# Altium PCB dxf.PcbDoc
Units mm, origin at the board's own origin, x right, y up, seen from the top; angles counter-clockwise.
Board outline 91.85 x 91.85 mm, 2 copper layers (Top Layer, Bottom Layer); 1 components, 0 nets, 0 pads, 0 vias.
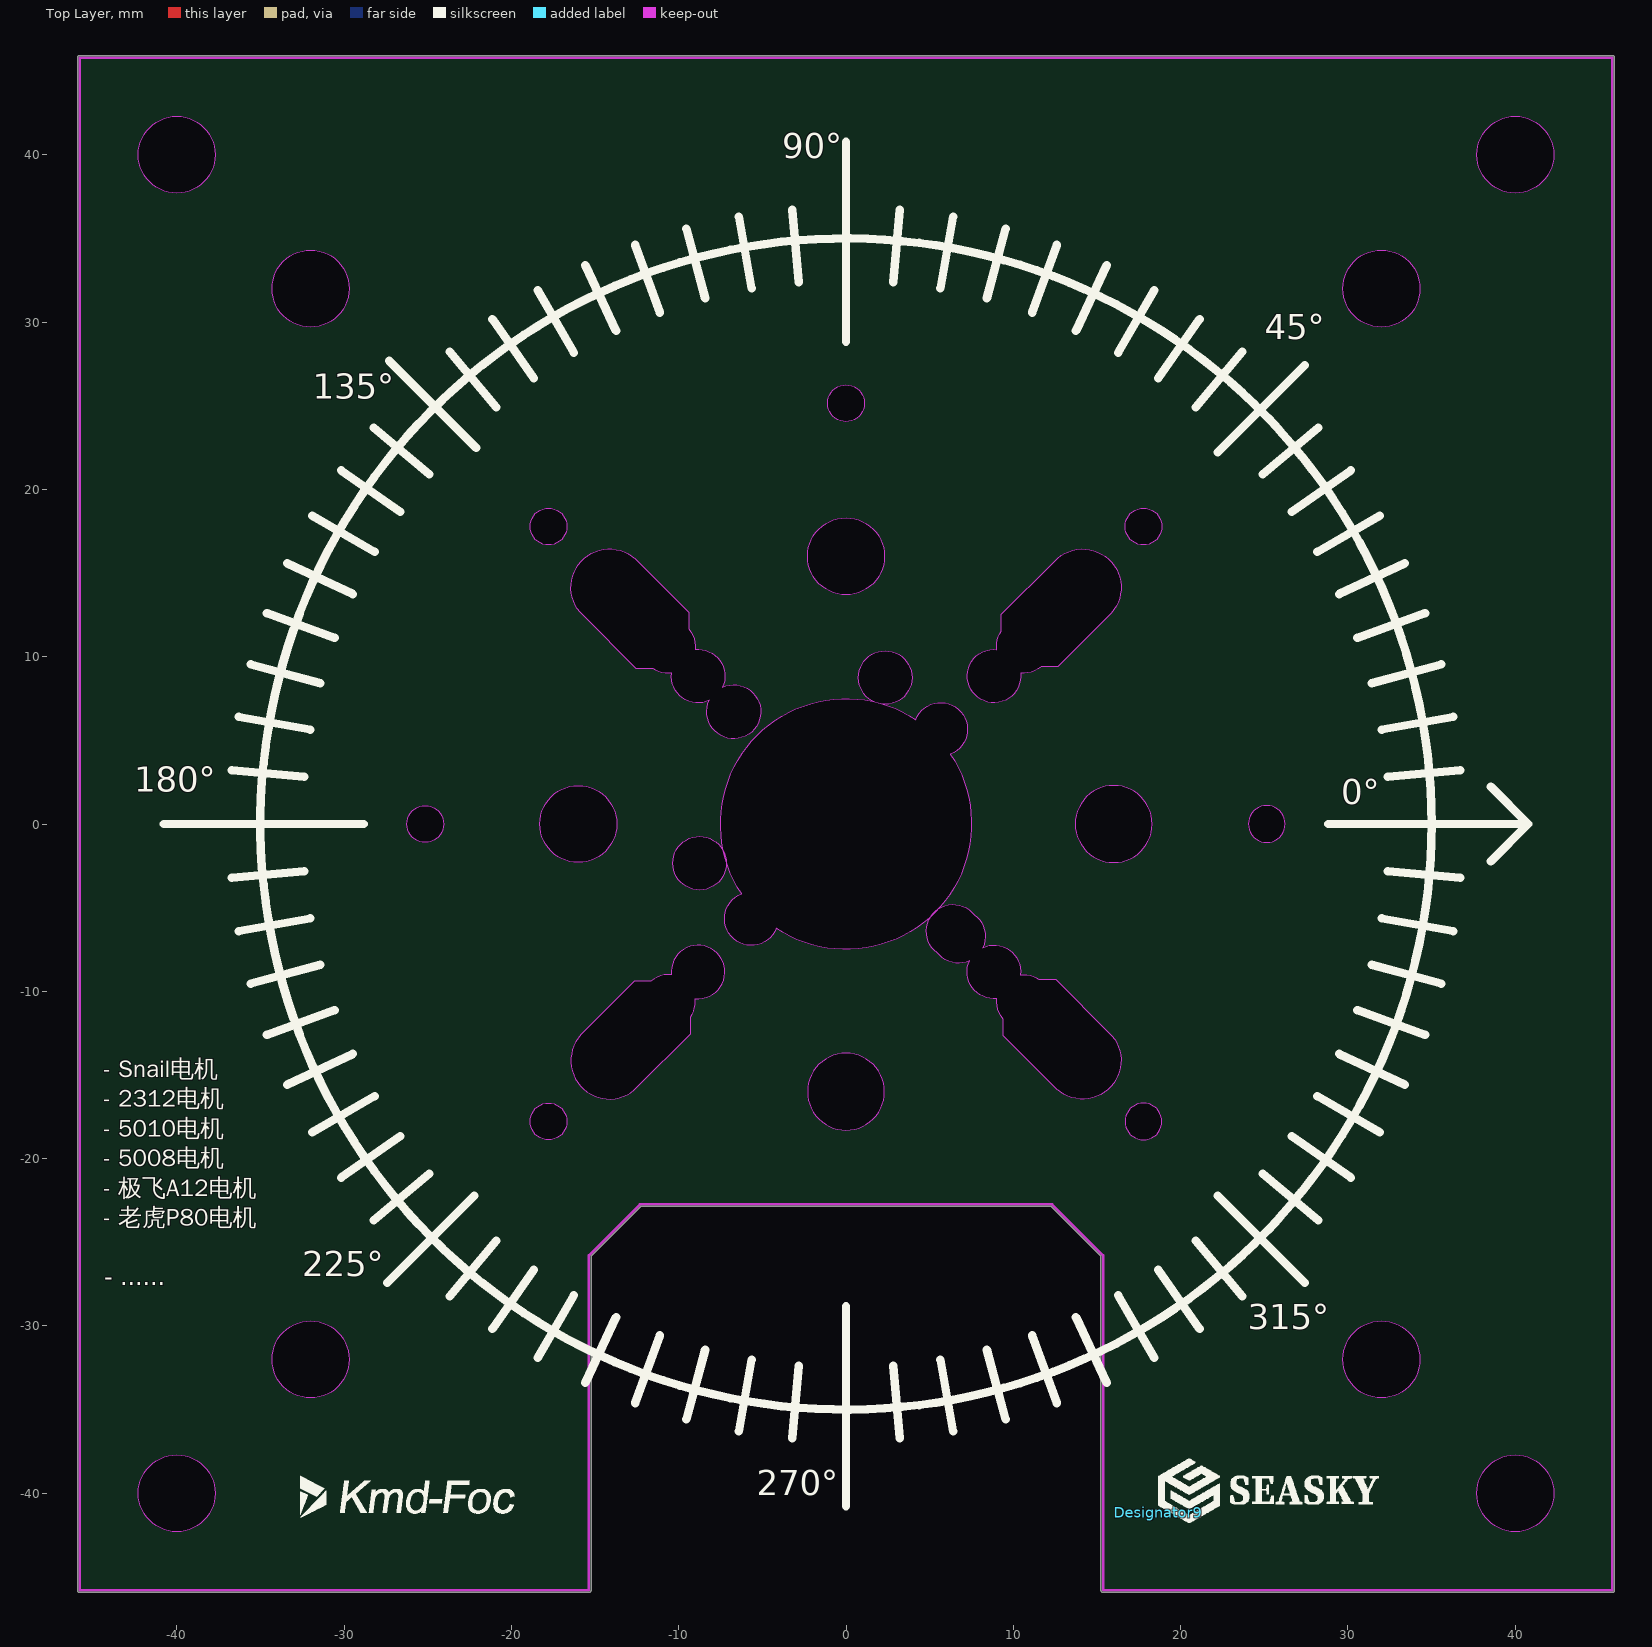
[diagram p0: Top Layer view]
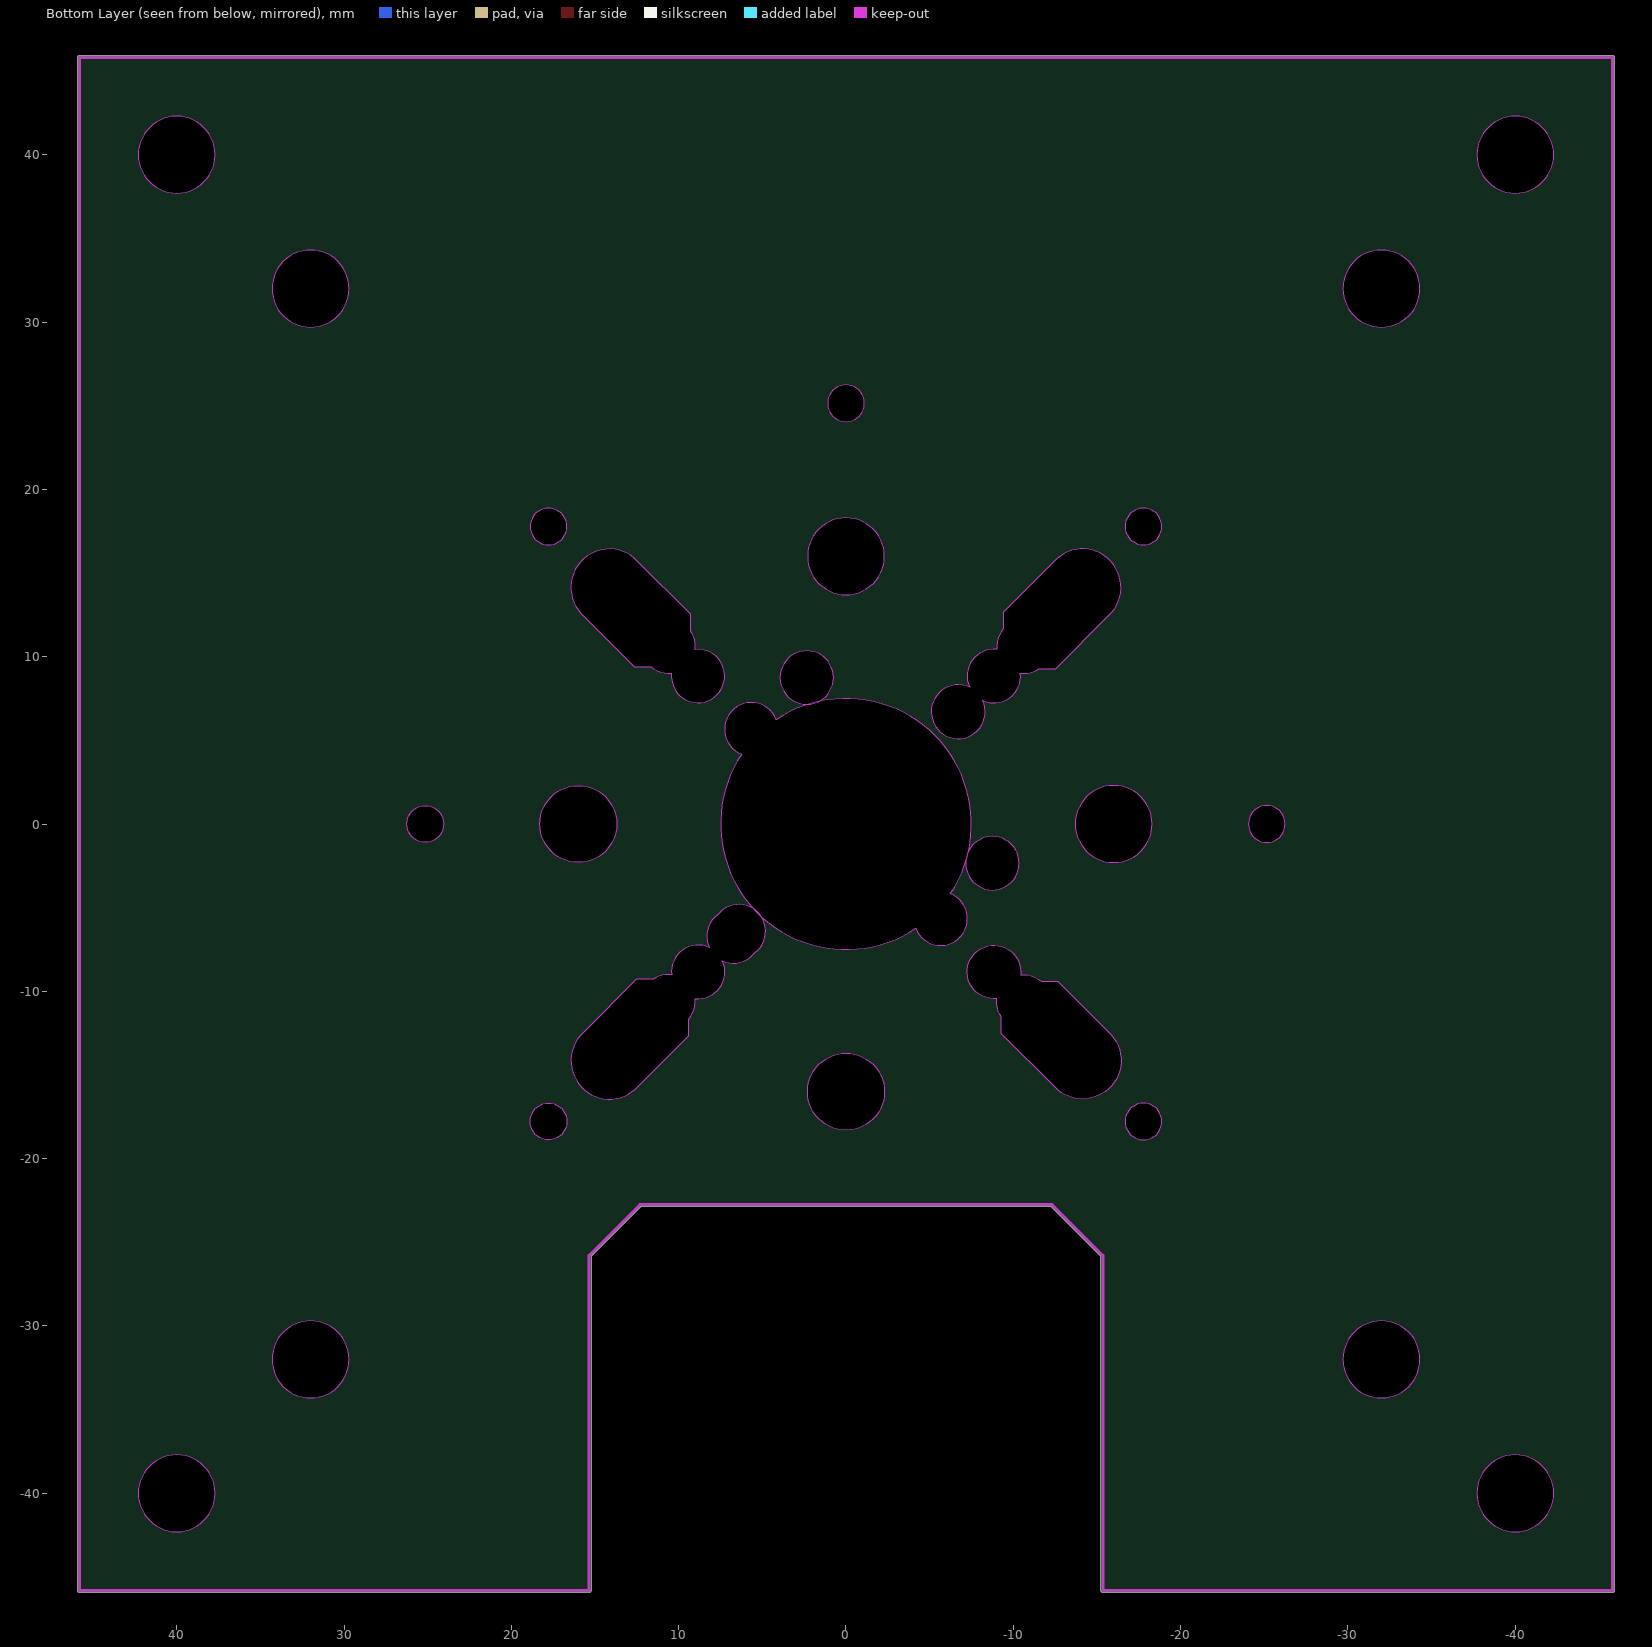
[diagram p1: Bottom Layer view, seen from below]

## Layer stack, top to bottom
Top Solder: solder mask 0.0102, Solder Resist, Dk 3.5
Top Layer: signal copper 0.0356
Dielectric 1: dielectric 0.32, FR-4, Dk 4.8
Bottom Layer: signal copper 0.0356
Bottom Solder: solder mask 0.0102, Solder Resist, Dk 3.5

## Board outline
-45.8,-45.927 cw(c-45.8,-45.8) -45.927,-45.8 -45.927,45.8 cw(c-45.8,45.8) -45.8,45.927 45.8,45.927 cw(c45.8,45.8) 45.927,45.8 45.927,-45.8 cw(c45.8,-45.8) 45.8,-45.927 15.367,-45.927 cw(c15.367,-45.8) 15.24,-45.8 15.24,-25.834 12.266,-22.86 -12.266,-22.86 -15.24,-25.834 -15.24,-45.8 cw(c-15.367,-45.8) -15.367,-45.927
cut-out: 9.014,10.429 cw(c10.605,10.603) 9.292,11.519 9.292,12.543 12.464,15.715 cw(c14.142,14.142) 15.847,12.598 12.647,9.398 11.656,9.398 cw(c10.608,10.606) 10.43,9.016 cw(c8.844,8.842)
cut-out: 9.016,-10.43 cw(c8.842,-8.837) 7.384,-8.172 cw(c6.716,-6.725) 5.453,-7.698 cw(c6.404,-6.408) 7.675,-5.431 cw(c6.713,-6.715) 8.172,-7.384 cw(c8.839,-8.839) 10.429,-9.014 cw(c10.603,-10.605) 11.519,-9.292 12.543,-9.292 15.715,-12.464 cw(c14.142,-14.142) 12.598,-15.847 9.398,-12.647 9.398,-11.656 cw(c10.606,-10.608)
cut-out: -4.166,-6.237 cw(c-5.657,-5.657) -6.237,-4.166 cw(c0,0) 4.166,6.237 cw(c5.657,5.657) 6.238,4.166 cw(c-0.002,0.003)
cut-out: -15.847,-12.598 ccw(c-14.142,-14.142) -12.464,-15.715 -9.292,-12.543 -9.292,-11.519 ccw(c-10.606,-10.607) -9.016,-10.429 ccw(c-8.84,-8.84) -10.43,-9.009 ccw(c-10.598,-10.604) -11.656,-9.399 -12.647,-9.398
cut-out: -12.543,9.292 -15.715,12.464 cw(c-14.142,14.142) -12.598,15.847 -9.398,12.647 -9.398,11.656 cw(c-10.606,10.608) -9.016,10.43 cw(c-8.842,8.837) -7.384,8.172 cw(c-6.708,6.708) -8.172,7.384 cw(c-8.839,8.839) -10.429,9.014 cw(c-10.603,10.605) -11.519,9.292
cut-out: -25.144,-1.1 cw(c-25.144,0) -26.244,0 cw(c-25.144,0) -25.144,1.1 cw(c-25.144,0) -24.044,0 cw(c-25.144,0)
cut-out: 0,24.044 cw(c0,25.144) -1.1,25.144 cw(c0,25.144) 0,26.244 cw(c0,25.144) 1.1,25.144 cw(c0,25.144)
cut-out: 24.044,0 ccw(c25.144,0) 25.144,-1.1 ccw(c25.144,0) 26.244,0 ccw(c25.144,0) 25.144,1.1 ccw(c25.144,0)
cut-out: -17.78,-18.88 cw(c-17.78,-17.78) -18.88,-17.78 cw(c-17.78,-17.78) -17.78,-16.68 cw(c-17.78,-17.78) -16.68,-17.78 cw(c-17.78,-17.78)
cut-out: 16.68,-17.78 ccw(c17.78,-17.78) 17.78,-18.88 ccw(c17.78,-17.78) 18.88,-17.78 ccw(c17.78,-17.78) 17.78,-16.68 ccw(c17.78,-17.78)
cut-out: 17.78,16.68 cw(c17.78,17.78) 16.68,17.78 cw(c17.78,17.78) 17.78,18.88 cw(c17.78,17.78) 18.88,17.78 cw(c17.78,17.78)
cut-out: -17.78,16.68 cw(c-17.78,17.78) -18.88,17.78 cw(c-17.78,17.78) -17.78,18.88 cw(c-17.78,17.78) -16.68,17.78 cw(c-17.78,17.78)
cut-out: 29.7,-32 cw(c32,-32) 32,-29.7 cw(c32,-32) 34.3,-32 cw(c32,-32) 32,-34.3 cw(c32,-32)
cut-out: -32,-29.7 cw(c-32,-32) -29.7,-32 cw(c-32,-32) -32,-34.3 cw(c-32,-32) -34.3,-32 cw(c-32,-32)
cut-out: -29.7,32 cw(c-32,32) -32,29.7 cw(c-32,32) -34.3,32 cw(c-32,32) -32,34.3 cw(c-32,32)
cut-out: 32,29.7 cw(c32,32) 29.7,32 cw(c32,32) 32,34.3 cw(c32,32) 34.3,32 cw(c32,32)
cut-out: 37.7,-40 cw(c40,-40) 40,-37.7 cw(c40,-40) 42.3,-40 cw(c40,-40) 40,-42.3 cw(c40,-40)
cut-out: -40,-37.7 cw(c-40,-40) -37.7,-40 cw(c-40,-40) -40,-42.3 cw(c-40,-40) -42.3,-40 cw(c-40,-40)
cut-out: -37.7,40 cw(c-40,40) -40,37.7 cw(c-40,40) -42.3,40 cw(c-40,40) -40,42.3 cw(c-40,40)
cut-out: 40,37.7 cw(c40,40) 37.7,40 cw(c40,40) 40,42.3 cw(c40,40) 42.3,40 cw(c40,40)
cut-out: 2.345,7.151 cw(c2.345,8.751) 0.745,8.751 cw(c2.345,8.751) 2.345,10.351 cw(c2.345,8.751) 3.945,8.751 cw(c2.345,8.751)
cut-out: -8.751,-3.945 cw(c-8.751,-2.345) -10.351,-2.345 cw(c-8.751,-2.345) -8.751,-0.745 cw(c-8.751,-2.345) -7.151,-2.345 cw(c-8.751,-2.345)
cut-out: 0,13.7 cw(c0,16) -2.3,16 cw(c0,16) 0,18.3 cw(c0,16) 2.3,16 cw(c0,16)
cut-out: -2.3,-16 ccw(c0,-16) 0,-18.3 ccw(c0,-16) 2.3,-16 ccw(c0,-16) 0,-13.7 ccw(c0,-16)
cut-out: 13.7,0 ccw(c16,0) 16,-2.3 ccw(c16,0) 18.3,0 ccw(c16,0) 16,2.3 ccw(c16,0)
cut-out: -16,-2.3 cw(c-16,0) -18.3,0 cw(c-16,0) -16,2.3 cw(c-16,0) -13.7,0 cw(c-16,0)

## Design rules (kind name [scope] priority, off if disabled: settings)
Clearance [All] p1: gap=0.254 ignorepadtopadclearanceinfootprint=FALSE except(0: Arc-Hole Track-Hole SMDPad-Hole THPad-Hole Via-Hole Fill-Hole Poly-Hole Region-Hole Text-Hole)
PolygonConnect [All] p1: connectstyle=Relief reliefconductorwidth=0.254 reliefentries=4 polygonreliefangle="90 Angle" airgapwidth=0.254
RoutingVias [All] p1: holewidth=0.711 width=1.27 viastyle="Through Hole" minholewidth=0.711 minwidth=1.27 maxholewidth=0.711 maxwidth=1.27
SolderMaskExpansion [All] p1: expansion=0.102 istentingtop=FALSE
Width [All] p1: maxlimit=0.254 minlimit=0.254 preferedwidth=0.254
30 further rules are at their usual default settings.

## Components (designator, comment, footprint, x,y, rotation, side; value= is the part's Value field where it differs from the comment)
Designator9 "Comment" SEASKY1 18.669,-41.148 r0 top

## Footprints (in the part's own frame and the unit in brackets; to place one, negate y for a bottom-side part, rotate by r counter-clockwise, add the part's x,y. Pads: shape width x height; smd on the part's side, far side on the other; paste and mask are expansions set on the pad)
SEASKY1 [mm]
  silkscreen extent 0,-0.58 13.16,3.2

## Nets (pads, with @x,y where several pads share a name; then routed paths per layer and width w, separated by ;. In a path a pad name is that pad's centre, name@x,y a point inside that pad or via, vN(x,y) a via of type N, cw(c..) or ccw(c..) an arc to the next point about the centre after c; other vN are vias at no path point)

## Keep-outs
Keep-Out Layer:
  lines w0.152: -45.8,-45.8 -15.367,-45.8 -15.367,-25.781 -12.319,-22.733 12.319,-22.733 15.367,-25.781 15.367,-39.751 15.367,-45.8 45.8,-45.8 ; -45.8,-45.8 -45.8,45.8 ; -45.8,-45.8 -45.8,45.8 ; -45.8,45.8 45.8,45.8 ; -45.8,45.8 45.8,45.8 ; 45.8,-45.8 45.8,45.8 ; 45.8,-45.8 45.8,45.8

## Silkscreen, mask and mechanical layers (free items; w line width, h text height)
Top Overlay:
  drawing of 86 lines, arcs and shapes, not listed
  text "90°" at -3.81,39.27 h2.54
  text "45°" at 25.019,28.475 h2.54
  text "135°" at -31.875,24.919 h2.54
  text "180°" at -42.543,1.424 h2.54
  text "0°" at 29.591,0.662 h2.54
  text "225°" at -32.512,-27.532 h2.54
  text "- Snail电机 / - 2312电机 / - 5010电机 / - 5008电机 / - 极飞A12电机 / - 老虎P80电机 /  / - ......" at -44.323,-27.94 h1.78
  text "315°" at 24.003,-30.707 h2.54
  text "270°" at -5.334,-40.613 h2.54
Mechanical 1:
  circle w0.152: c32,-32 r2.3
  circle w0.152: c-32,-32 r2.3
  circle w0.152: c-32,32 r2.3
  circle w0.152: c32,32 r2.3
  circle w0.152: c40,-40 r2.3
  circle w0.152: c-40,-40 r2.3
  circle w0.152: c-40,40 r2.3
  circle w0.152: c40,40 r2.3
  circle w0.152: c25.144,0 r1.1
  circle w0.152: c-17.78,17.78 r1.1
  circle w0.152: c0,25.144 r1.1
  circle w0.152: c-25.144,0 r1.1
  circle w0.152: c17.78,17.78 r1.1
  circle w0.152: c17.78,-17.78 r1.1
  circle w0.152: c-17.78,-17.78 r1.1
  circle w0.152: c16,0 r2.3
  circle w0.152: c0,-16 r2.3
  circle w0.152: c-16,0 r2.3
  circle w0.152: c0,16 r2.3
  circle w0.152: c-8.751,-2.345 r1.6
  circle w0.152: c2.345,8.751 r1.6
  lines w0.152: -11.656,-9.399 cw(c-10.606,-10.607) -10.43,-9.016 ; -11.656,-9.398 -12.647,-9.398 -15.847,-12.598 ccw(c-14.142,-14.142) -12.464,-15.715 -9.292,-12.543 -9.292,-11.891 -9.292,-11.519 ccw(c-10.606,-10.607) -9.016,-10.429 ; -10.43,-9.009 cw(c-8.839,-8.839) -9.014,-10.429 ; -10.429,9.014 ccw(c-8.839,8.839) -8.172,7.384 ccw(c-6.717,6.718) -7.393,8.168 ; -10.429,9.016 cw(c-10.607,10.606) -11.519,9.292 -11.891,9.292 -12.543,9.292 -15.715,12.464 cw(c-14.142,14.142) -12.598,15.847 -9.398,12.647 -9.398,11.656 ; -9.399,11.656 cw(c-10.607,10.606) -9.016,10.43 ; -9.009,10.43 cw(c-8.839,8.839) -7.384,8.172 ; -6.237,-4.166 ccw(c-5.657,-5.657) -4.166,-6.237 ccw(c0,0) 6.24,4.16 ; -6.237,-4.165 cw(c0,0) 4.166,6.237 cw(c5.657,5.657) 6.238,4.166 ; 5.453,-7.698 ccw(c6.717,-6.718) 7.393,-8.168 ; 5.457,-7.694 cw(c6.407,-6.406) 7.675,-5.431 ; 7.384,-8.172 ccw(c8.839,-8.839) 9.009,-10.43 ; 7.676,-5.436 cw(c6.717,-6.718) 8.172,-7.384 cw(c8.839,-8.839) 10.429,-9.014 ; 9.014,10.429 ccw(c8.839,8.839) 10.43,9.009 ; 9.016,10.429 cw(c10.606,10.607) 9.292,11.519 9.292,11.891 9.292,12.543 12.464,15.715 cw(c14.142,14.142) 15.847,12.598 12.647,9.398 11.656,9.398 ; 9.016,-10.43 ccw(c10.607,-10.606) 9.399,-11.656 ; 9.398,-11.656 9.398,-12.647 12.598,-15.847 ccw(c14.142,-14.142) 15.715,-12.464 12.543,-9.292 11.891,-9.292 11.519,-9.292 ccw(c10.607,-10.606) 10.429,-9.016 ; 10.43,9.016 ccw(c10.606,10.607) 11.656,9.399 ; -45.927,-45.8 ccw(c-45.8,-45.8) -45.8,-45.927 -15.367,-45.927 ccw(c-15.367,-45.8) -15.24,-45.8 -15.24,-25.834 -12.266,-22.86 12.266,-22.86 15.24,-25.834 15.24,-45.8 ccw(c15.367,-45.8) 15.367,-45.927 45.8,-45.927 ccw(c45.8,-45.8) 45.927,-45.8 45.927,45.8 ccw(c45.8,45.8) 45.8,45.927 -45.8,45.927 ccw(c-45.8,45.8) -45.927,45.8 -45.927,-45.8